# Altium PCB pcb.PcbDoc (part 1 of 2)
Units mm, origin at the board's own origin, x right, y up, seen from the top; angles counter-clockwise.
Board outline 100 x 100 mm, 2 copper layers (Top Layer, Bottom Layer); 16 components, 50 nets, 301 pads, 580 vias.
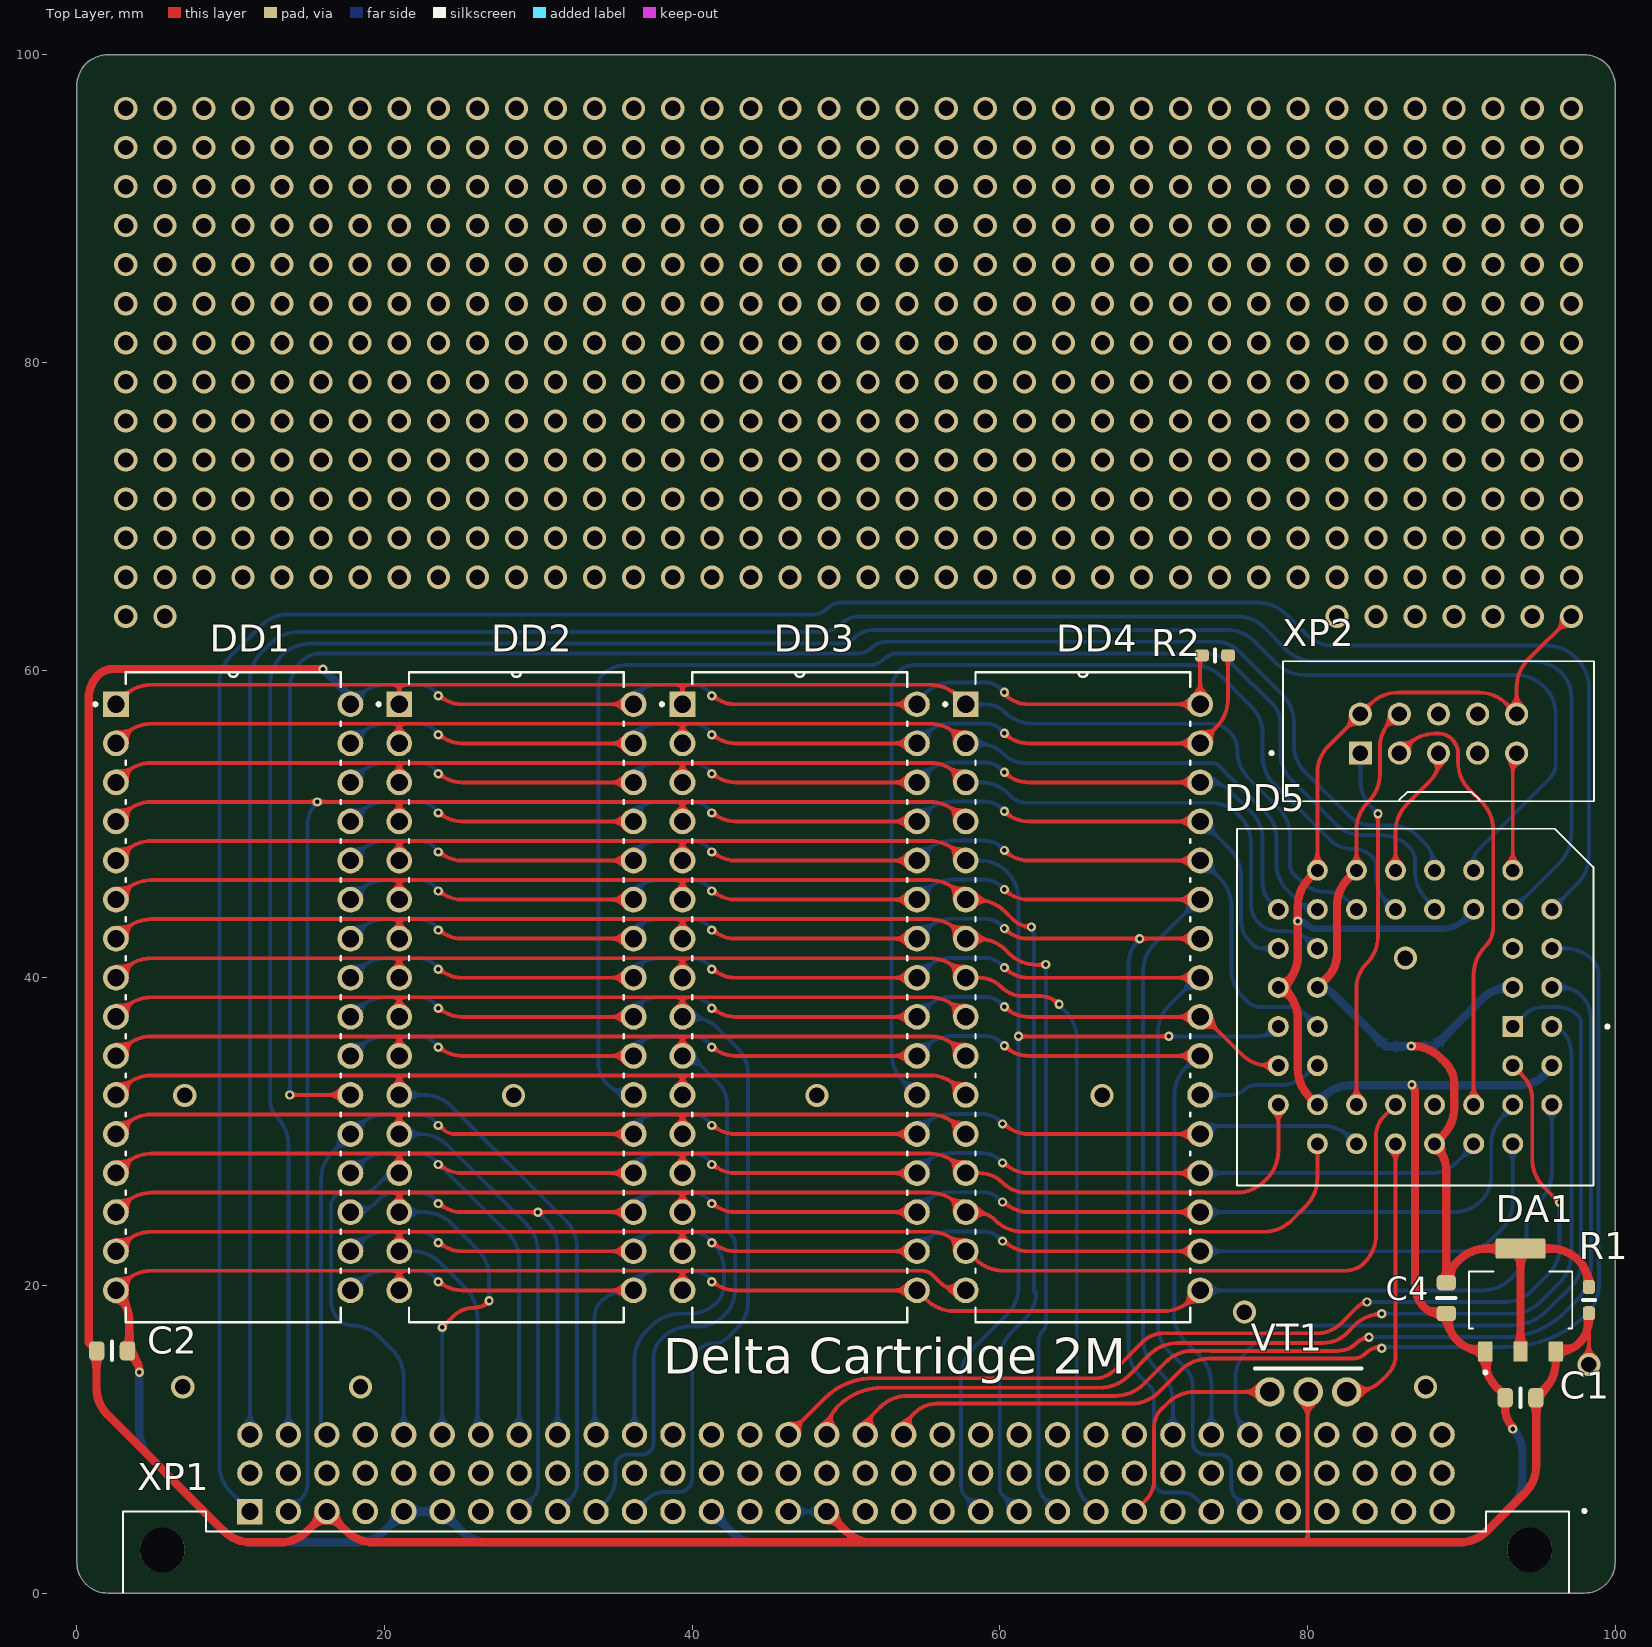
[diagram p0: Top Layer view]
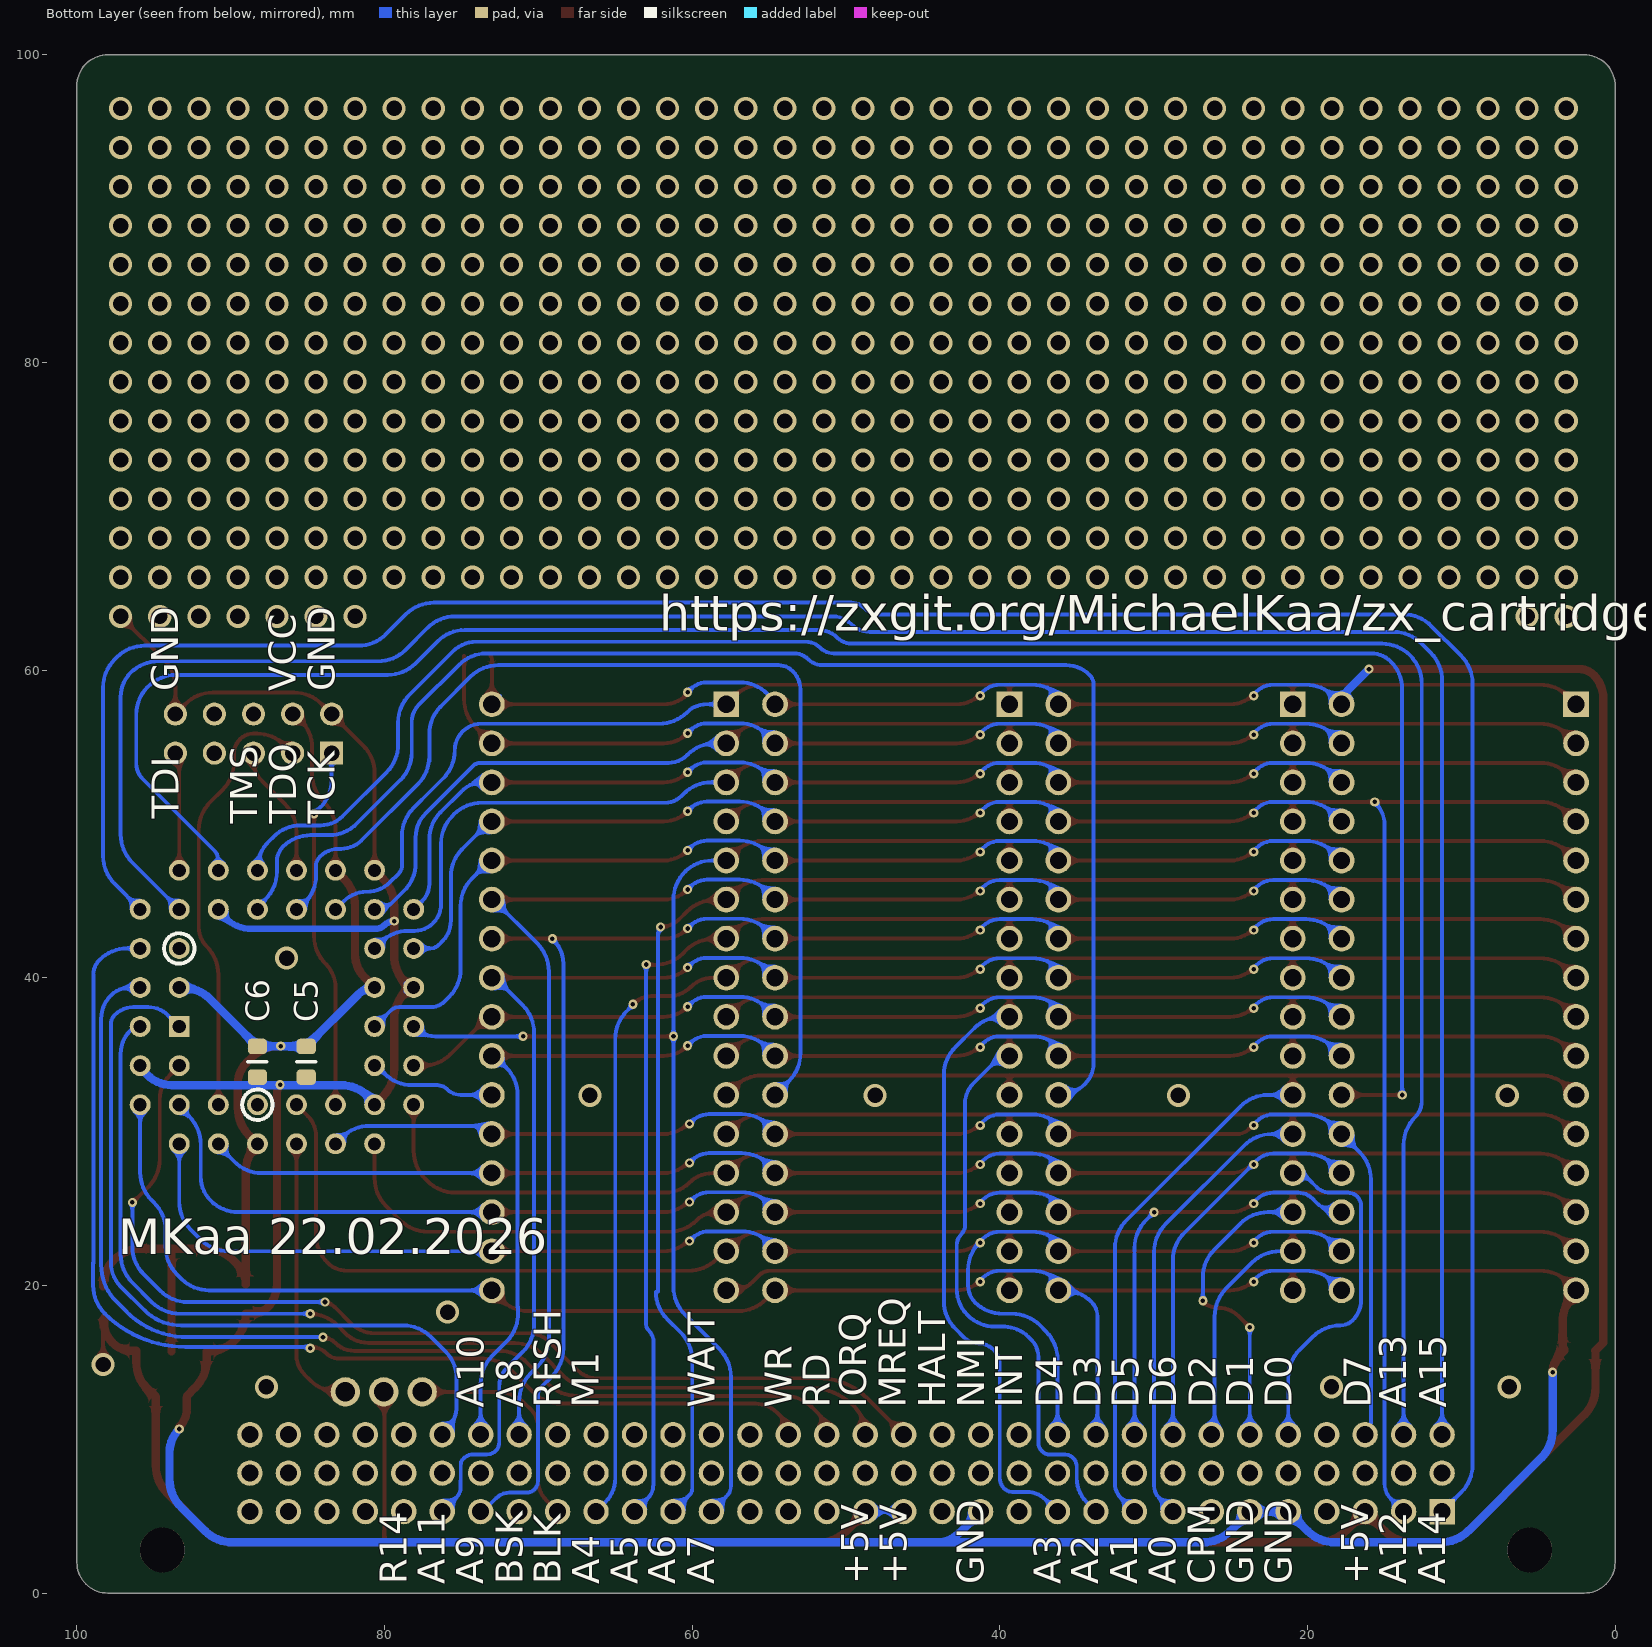
[diagram p1: Bottom Layer view, seen from below]
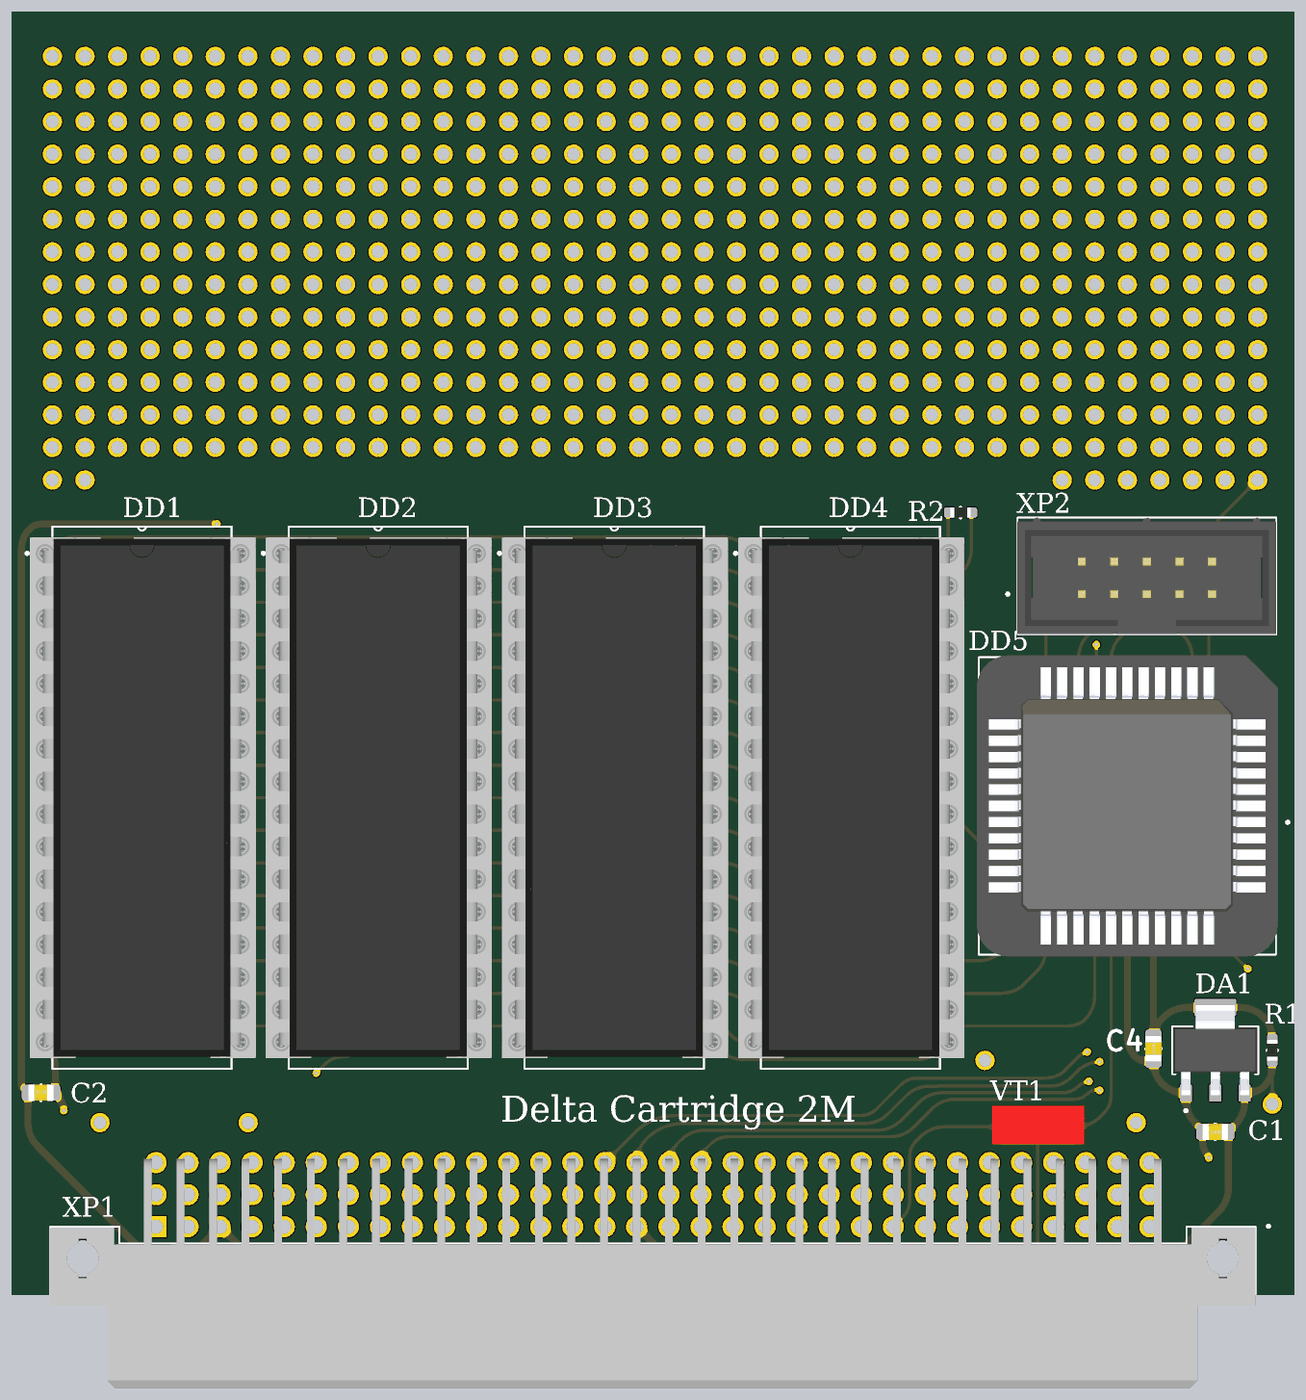
[diagram p3: 3D render of the assembled board from above, using the file's embedded part models]

## Layer stack, top to bottom
Top Solder: solder mask 0.0102, Solder Resist, Dk 3.5
Top Layer: signal copper 0.0356
Dielectric 1: dielectric 0.32, FR-4, Dk 4.8
Bottom Layer: signal copper 0.0356
Bottom Solder: solder mask 0.0102, Solder Resist, Dk 3.5

## Board outline
2,0 cw(c2,2) 0,2 0,98 cw(c2,98) 2,100 98,100 cw(c98,98) 100,98 100,2 cw(c98,2) 98,0

## Design rules (kind name [scope] priority, off if disabled: settings)
Clearance [All] p1: gap=0.254 ignorepadtopadclearanceinfootprint=FALSE except(0: Arc-Hole Track-Hole SMDPad-Hole THPad-Hole Via-Hole Fill-Hole Poly-Hole Region-Hole Text-Hole)
PolygonConnect [All] p1: connectstyle=Relief reliefconductorwidth=0.254 reliefentries=4 polygonreliefangle="90 Angle" airgapwidth=0.254
RoomDefinition main [InComponentClass('main')] p1: confinementstyle=ConfineIn formatcopy=TRUE lockcomponents=FALSE outline -0.44,-8.31 104.775,-8.31 104.775,100.33 -0.44,100.33
RoutingVias [All] p1: holewidth=0.711 width=1.27 viastyle="Through Hole" minholewidth=0.711 minwidth=1.27 maxholewidth=0.711 maxwidth=1.27
SolderMaskExpansion [All] p1: expansion=0.102
Width [All] p1: maxlimit=0.54 minlimit=0.254 preferedwidth=0.254 minimp=50.000000 maximp=50.000000 favimp=50.000000
30 further rules are at their usual default settings.

## Components (designator, comment, footprint, x,y, rotation, side; value= is the part's Value field where it differs from the comment)
C1 "10uF" C0805 93.853,12.7 r180 top
C2 "10uF" C0805 2.286,15.748 r0 top
C4 "10uF" C0805 89.027,19.177 r270 top
C5 "10uF" C0805 85.09,34.544 r270 bottom
C6 "10uF" C0805 88.265,34.544 r270 bottom
DA1 "AMS1117-3.3" SOT229P700X180-4N 93.853,19.05 r90 top
DD1 "AM29F040B" DIP254P1524X482-32 17.78,19.685 r0 top
DD2 "AM29F040B" DIP254P1524X482-32 36.195,19.685 r0 top
DD3 "AM29F040B" DIP254P1524X482-32 54.61,19.685 r0 top
DD4 "AM29F040B" DIP254P1524X482-32 73.025,19.685 r0 top
DD5 "EPM7064SLC44" PLCC-44-R 86.995,38.1 r270 top
R1 "0" R0603 98.298,19.05 r90 top
R2 "0" R0603 73.99,60.96 r180 top
VT1 "КТ315Б" KT-13 80.05,13.081 r0 top
XP1 "delta_device" DELTA-DEVICE 50,5.3 r0 top
XP2 "BH-10" BH-10 88.519,55.88 r0 top

## Footprints (in the part's own frame and the unit in brackets; to place one, negate y for a bottom-side part, rotate by r counter-clockwise, add the part's x,y. Pads: shape width x height; smd on the part's side, far side on the other; paste and mask are expansions set on the pad)
BH-10 [mm]
  rect 1.508x1.508 / inner round 1.508 / far side rect 1.508x1.508 hole 1: 1(-5.08,-1.27)
  round 1.508 hole 1: 2(-5.08,1.27) 3(-2.54,-1.27) 4(-2.54,1.27) 5(0,-1.27) 6(0,1.27) 7(2.54,-1.27) 8(2.54,1.27) 9(5.08,-1.27) 10(5.08,1.27)
  silkscreen extent -10.95,-4.4 10.1,4.7, body extent -10.1,-4.39 10.1,4.7, height 9.09
C0805 [mm] "Chip_Capasitor_0805"
  rrect50% 1x1.25 smd mask+0.102: 1(-1,0) 2(1,0)
  silkscreen extent 0,-0.6 0,0.6, body extent -1,-0.64 1,0.65, height 1.35
DELTA-DEVICE [mm]
  rect 1.65x1.65 / inner round 1.65 / far side rect 1.65x1.65 hole 1.1: A1(-38.75,0)
  round 1.65 hole 1.1: A2(-36.25,0) A3(-33.75,0) A4(-31.25,0) A5(-28.75,0) A6(-26.25,0) A7(-23.75,0) A8(-21.25,0) A9(-18.75,0) A10(-16.25,0) A11(-13.75,0) A12(-11.25,0) A13(-8.75,0) A14(-6.25,0) A15(-3.75,0) A16(-1.27,0) A17(1.25,0) A18(3.75,0) A19(6.25,0) A20(8.75,0) A21(11.25,0) A22(13.75,0) A23(16.25,0) A24(18.75,0) A25(21.25,0) A26(23.75,0) A27(26.25,0) A28(28.75,0) A29(31.25,0) A30(33.75,0) A31(36.25,0) A32(38.75,0) B1(-38.75,2.5) B2(-36.25,2.5) B3(-33.75,2.5) B4(-31.25,2.5) B5(-28.75,2.5) B6(-26.25,2.5) B7(-23.75,2.5) B8(-21.25,2.5) B9(-18.75,2.5) B10(-16.25,2.5) B11(-13.75,2.5) B12(-11.25,2.5) B13(-8.75,2.5) B14(-6.25,2.5) B15(-3.75,2.5) B16(-1.25,2.5) B17(1.25,2.5) B18(3.75,2.5) B19(6.25,2.5) B20(8.75,2.5) B21(11.25,2.5) B22(13.75,2.5) B23(16.25,2.5) B24(18.75,2.5) B25(21.25,2.5) B26(23.75,2.5) B27(26.25,2.5) B28(28.75,2.5) B29(31.25,2.5) B30(33.75,2.5) B31(36.25,2.5) B32(38.75,2.5) C1(-38.75,5) C2(-36.25,5) C3(-33.75,5) C4(-31.25,5) C5(-28.75,5) C6(-26.25,5) C7(-23.75,5) C8(-21.25,5) C9(-18.75,5) C10(-16.25,5) C11(-13.75,5) C12(-11.25,5) C13(-8.75,5) C14(-6.25,5) C15(-3.75,5) C16(-1.25,5) C17(1.25,5) C18(3.75,5) C19(6.25,5) C20(8.75,5) C21(11.25,5) C22(13.75,5) C23(16.25,5) C24(18.75,5) C25(21.25,5) C26(23.75,5) C27(26.25,5) C28(28.75,5) C29(31.25,5) C30(33.75,5) C31(36.25,5) C32(38.75,5)
  round 2.9 hole 2.9 unplated: ""(-44.45,-2.5) ""(44.45,-2.5)
  silkscreen extent -47,-5.26 48.1,0.14, body extent -47.01,-12.57 46.99,5.28, height 9.15
DIP254P1524X482-32 [mil]
  rect 66x66 hole 44: 1(-600,1500)
  round 66 hole 44: 2(-600,1400) 3(-600,1300) 4(-600,1200) 5(-600,1100) 6(-600,1000) 7(-600,900) 8(-600,800) 9(-600,700) 10(-600,600) 11(-600,500) 12(-600,400) 13(-600,300) 14(-600,200) 15(-600,100) 16(-600,0) 17(0,0) 18(0,100) 19(0,200) 20(0,300) 21(0,400) 22(0,500) 23(0,600) 24(0,700) 25(0,800) 26(0,900) 27(0,1000) 28(0,1100) 29(0,1200) 30(0,1300) 31(0,1400) 32(0,1500)
  silkscreen extent -657,-82 -25,1582, body extent -645,-49 49,1549, height 377
KT-13 [mm]
  round 1.905 hole 1.27: 1(-2.5,0) 2(0,0) 3(2.5,0)
  body extent -3.6,-1.35 3.6,1.65, height 5.72
PLCC-44-R [mm]
  rect 1.358x1.358 hole 0.85: 1(1.27,6.35)
  round 1.358 hole 0.85: 2(-1.27,8.89) 3(-1.27,6.35) 4(-3.81,8.89) 5(-3.81,6.35) 6(-6.35,8.89) 7(-8.89,6.35) 8(-6.35,6.35) 9(-8.89,3.81) 10(-6.35,3.81) 11(-8.89,1.27) 12(-6.35,1.27) 13(-8.89,-1.27) 14(-6.35,-1.27) 15(-8.89,-3.81) 16(-6.35,-3.81) 17(-8.89,-6.35) 18(-6.35,-8.89) 19(-6.35,-6.35) 20(-3.81,-8.89) 21(-3.81,-6.35) 22(-1.27,-8.89) 23(-1.27,-6.35) 24(1.27,-8.89) 25(1.27,-6.35) 26(3.81,-8.89) 27(3.81,-6.35) 28(6.35,-8.89) 29(8.89,-6.35) 30(6.35,-6.35) 31(8.89,-3.81) 32(6.35,-3.81) 33(8.89,-1.27) 34(6.35,-1.27) 35(8.89,1.27) 36(6.35,1.27) 37(8.89,3.81) 38(6.35,3.81) 39(8.89,6.35) 40(6.35,8.89) 41(6.35,6.35) 42(3.81,8.89) 43(3.81,6.35) 44(1.27,8.89)
  silkscreen extent -11.59,-11.59 11.59,12.6, body extent -11.74,-11.74 11.74,11.74, height 8.31
R0603 [mm] "Chip_Resistor_0603"
  rrect50% 0.9x0.8 smd mask+0.1: 1(-0.85,0) 2(0.85,0)
  silkscreen extent 0,-0.4 0,0.4, body extent -0.8,-0.4 0.8,0.4, height 0.45
SOT229P700X180-4N [mm]
  rrect15% 1.31x0.93 smd: 1(-3.345,2.29) 2(-3.345,0) 3(-3.345,-2.29)
  rrect15% 1.31x3.24 smd: 4(3.345,0)
  silkscreen extent -4.8,-3.36 1.86,3.36, body extent -3.5,-3.25 3.5,3.25, height 1.8

## Part data
C1 C2 C4 C5 C6: library part CapCer
DD5: "44-Pin PLCC44"
R1 R2: library part Res
VT1: "NPN Transistor"
XP2: "10 Position Total Dual Row 2.54 mm Pitch Straight Male Shrouded Box Header", Package=None, Check_prices=https://www.snapeda.com/parts/SBH11-PBPC-D05-ST-BK/Sullins+Connector+Solutions/view-part/?ref=eda, MF="Sullins Connector", MP=SBH11-PBPC-D05-ST-BK, SnapEDA_Link=https://www.snapeda.com/parts/SBH11-PBPC-D05-ST-BK/Sullins+Connector+Solutions/view-part/?ref=snap

## Via types
v1: diameter 1.5, hole 1, Top Layer to Bottom Layer, 513 vias
v2: diameter 0.6, hole 0.3, Top Layer to Bottom Layer, 67 vias

## Nets (pads, with @x,y where several pads share a name; then routed paths per layer and width w, separated by ;. In a path a pad name is that pad's centre, name@x,y a point inside that pad or via, vN(x,y) a via of type N, cw(c..) or ccw(c..) an arc to the next point about the centre after c; other vN are vias at no path point)
+5.0V: C1.1 C2.1 DA1.3 DD1.32 DD2.32 DD3.32 DD4.32 R1.1 R2.2 VT1.2 XP1.A3 XP1.A15 XP1.A16 | length 256.9
  Top Layer w0.254: v2@23.495,58.42 ccw(c25.028,59.953) 25.028,57.785 DD2.32@36.195,57.785 ; v2@41.275,58.42 ccw(c42.808,59.953) 42.808,57.785 DD3.32@53.975,57.785 ; v2@60.325,58.42 ccw(c61.858,59.953) 61.858,57.785 DD4.32@73.025,57.785 73.025,60.704 cw(c73.459,60.704) R2.2@73.152,61.011 ; 80.01,3.302 80.01,12.774 cw(c80.444,12.774) VT1.2@80.137,13.081 ; v1(98.298,14.859) 98.298,17.789 R1.1@98.298,18.034
  Top Layer w0.54: C2.1@1.27,15.621 1.27,13.371 ccw(c3.81,13.371) 2.014,11.575 9.543,4.046 ccw(c11.339,5.842) 11.339,3.302 13.2,3.302 ccw(c13.2,5.842) 14.996,4.046 XP1.A3@16.25,5.3 17.504,4.046 ccw(c19.3,5.842) 19.3,3.302 51.689,3.302 ; C2.1@1.286,15.748 1.281,15.753 1.281,15.764 0.762,16.282 0.762,58.157 cw(c2.93,58.157) 1.397,59.69 cw(c2.317,58.77) 2.317,60.071 v2@15.971,60.071 ; XP1.A16@48.73,5.3 50.049,3.981 ccw(c51.689,5.622) 51.689,3.302 ; 53.086,3.302 51.689,3.302 ; 53.177,3.302 80.01,3.302 89.88,3.302 ccw(c89.88,5.842) 91.676,4.046 94.125,6.495 ccw(c92.329,8.291) 94.869,8.291 C1.1@94.869,12.573 ; C1.1@94.869,12.7 94.869,12.774 94.998,12.904 ccw(c93.603,15.026) 96.143,15.026 DA1.3@96.143,15.705 ; DA1.3@96.139,15.748 96.437,15.748 ccw(c96.437,17.482) 97.663,16.256 ccw(c96.13,17.789) R1.1@98.298,17.789
  Bottom Layer w0.254: 17.421,58.652 cw(c16.554,57.785) DD1.32@17.78,57.785 18.306,58.311 cw(c20.102,56.515) 20.102,59.055 22.225,59.055 cw(c22.225,57.522) 23.309,58.606 v2@23.495,58.42 ; DD2.32@36.086,58.311 cw(c37.882,56.515) 37.882,59.055 40.005,59.055 cw(c40.005,57.522) 41.089,58.606 ; DD2.32@36.195,57.785 DD2.32@36.721,58.311 ; XP1.A15@46.25,5.3 48.553,5.3 ccw(c48.553,5.676) XP1.A16@48.819,5.41 ; 55.111,58.463 cw(c56.907,56.667) 56.907,59.207 59.03,59.207 cw(c59.03,57.674) v2@60.114,58.758 ; DD4.32@72.499,58.311 DD4.32@73.025,57.785
  Bottom Layer w0.54: v2(16.002,60.071) 17.421,58.652
  other v2: 23.495,58.344 41.275,58.344 60.3,58.572
+EPM: C4.1 C5.1 C6.1 DA1.2 DA1.4 DD5.3 DD5.15 DD5.23 DD5.35 R1.2 XP2.4 | length 71.2
  Top Layer w0.254: DD5.15@83.185,46.99 83.185,49.621 cw(c85.725,49.621) 83.929,51.417 83.965,51.453 ccw(c82.169,53.249) 84.709,53.249 84.709,54.955 cw(c87.249,54.955) 85.453,56.751 XP2.4@85.852,57.15
  Top Layer w0.54: DD5.23@80.645,39.37 81.286,40.011 ; 81.287,40.012 ccw(c79.769,41.529) 81.915,41.529 81.915,44.668 cw(c84.455,44.668) 82.659,46.464 DD5.15@83.185,46.99 ; v2(86.741,35.56) 86.832,35.56 cw(c86.832,33.02) 88.628,34.816 88.996,34.448 cw(c87.695,33.147) 89.535,33.147 89.535,31.532 cw(c86.995,31.532) 88.791,29.736 DD5.35@88.265,29.21 88.283,29.192 cw(c86.487,27.396) 89.027,27.396 C4.1@89.027,20.177 ; C4.1@89.027,20.066 cw(c90.867,20.066) 89.566,21.367 89.85,21.651 cw(c91.646,19.855) 91.646,22.395 DA1.4@93.853,22.395 ; DA1.2@93.853,15.705 DA1.4@93.853,22.395 ; R1.2@98.298,19.939 98.298,19.971 ccw(c95.922,19.971) 97.602,21.651 ccw(c95.806,19.855) 95.806,22.395 DA1.4@93.853,22.395
  Bottom Layer w0.54: DD5.23@80.645,39.37 cw(c80.645,37.876) 81.702,38.932 ; 81.702,38.932 C5.1@85.09,35.544 86.702,35.544 ccw(c86.702,35.599) v2(86.741,35.56) C6.1@88.265,35.544 91.347,38.626 cw(c93.143,36.83) 93.143,39.37 DD5.3@93.218,39.37
A0: DD1.12 DD2.12 DD3.12 DD4.12 XP1.A8 | length 87.3
  Top Layer w0.254: DD1.12@3.066,30.371 cw(c4.862,28.575) 4.862,31.115 20.955,31.115 ; DD2.12@20.955,29.845 20.955,31.115 ; DD3.12@39.37,29.845 39.37,31.115 ; DD4.12@57.259,30.371 ccw(c55.463,28.575) 55.463,31.115 39.37,31.115 ; 20.955,31.115 39.37,31.115
  Bottom Layer w0.254: DD2.12@20.701,29.845 DD2.12@20.955,29.845 22.316,29.845 cw(c22.316,27.305) 24.112,29.101 29.228,23.985 cw(c27.432,22.189) 29.972,22.189 29.972,6.985 cw(c28.854,6.985) 29.645,6.195 XP1.A8@28.75,5.3
A1: DD1.11 DD2.11 DD3.11 DD4.11 XP1.A9 | length 90.8
  Top Layer w0.254: DD1.11@3.066,32.911 cw(c4.862,31.115) 4.862,33.655 20.955,33.655 ; DD2.11@20.955,32.385 20.955,33.655 ; DD3.11@39.37,32.385 39.37,33.655 ; DD4.11@57.259,32.911 ccw(c55.463,31.115) 55.463,33.655 39.37,33.655 ; 20.955,33.655 39.37,33.655
  Bottom Layer w0.254: DD2.11@20.955,32.385 22.57,32.385 cw(c22.57,29.845) 24.366,31.641 31.768,24.239 cw(c29.972,22.443) 32.512,22.443 32.512,7.112 cw(c31.184,7.112) 32.123,6.173 XP1.A9@31.25,5.3
A2: DD1.10 DD2.10 DD3.10 DD4.10 XP1.A10 | length 93.9
  Top Layer w0.254: DD1.10@3.066,35.451 cw(c4.862,33.655) 4.862,36.195 20.955,36.195 ; DD2.10@20.955,34.925 20.955,36.195 ; DD3.10@39.37,34.925 39.37,36.195 ; DD4.10@57.259,35.451 ccw(c55.463,33.655) 55.463,36.195 39.37,36.195 ; 20.955,36.195 39.37,36.195
  Bottom Layer w0.254: XP1.A10@33.75,5.3 34.335,5.885 ccw(c32.727,7.493) 35.001,7.493 35.001,8.237 cw(c35.782,8.237) 35.23,8.788 cw(c35.755,8.263) 35.755,9.006 36.745,9.006 ccw(c36.745,9.737) 37.262,9.22 ccw(c36.71,9.772) 37.49,9.772 37.49,15.355 cw(c39.051,15.355) 37.948,16.459 38.147,16.658 cw(c39.751,15.054) 39.29,17.276 cw(c39.751,15.054) 39.65,17.321 cw(c39.751,15.054) 39.751,17.323 ; DD3.10@39.395,35.027 cw(c39.395,33.984) 40.133,34.721 41.707,33.147 cw(c40.358,31.798) 42.266,31.798 42.266,23.894 ccw(c43.046,23.894) 42.494,23.343 cw(c41.758,22.607) 42.799,22.607 42.799,19.766 cw(c40.396,19.766) 42.095,18.067 cw(c40.299,19.863) 40.299,17.323 39.751,17.323 ; 39.726,17.323 39.751,17.323
A3: DD1.9 DD2.9 DD3.9 DD4.9 XP1.A11 | length 96.2
  Top Layer w0.254: DD1.9@3.066,37.991 cw(c4.862,36.195) 4.862,38.735 20.955,38.735 ; DD2.9@20.955,37.465 20.955,38.735 ; DD3.9@39.37,37.465 39.37,38.735 ; DD4.9@57.259,37.991 ccw(c55.463,36.195) 55.463,38.735 39.37,38.735 ; 20.955,38.735 39.37,38.735
  Bottom Layer w0.254: XP1.A11@36.25,5.3 37.005,6.055 cw(c38.269,4.791) 38.269,6.579 39.174,6.579 ccw(c39.174,7.359) 39.726,6.807 ccw(c39.051,7.482) 40.005,7.482 40.005,14.843 cw(c41.393,14.843) 40.411,15.824 cw(c41.393,14.843) 41.393,16.231 ccw(c41.393,17.541) 42.319,16.614 42.893,17.188 ccw(c41.097,18.985) 43.637,18.985 43.637,33.695 ccw(c41.097,33.695) 42.893,35.491 41.663,36.721 ccw(c39.867,34.925) 39.867,37.465 DD3.9@39.37,37.465 DD3.9@39.345,37.465
A4: DD1.8 DD2.8 DD3.8 DD4.8 XP1.A23 | length 97.6
  Top Layer w0.254: DD1.8@3.066,40.531 cw(c4.862,38.735) 4.862,41.275 20.955,41.275 ; DD2.8@20.955,40.005 20.955,41.275 ; DD3.8@39.37,40.005 39.37,41.275 ; DD4.8@57.259,40.531 ccw(c55.463,38.735) 55.463,41.275 39.37,41.275 ; DD4.8@57.683,40.005 DD4.8@57.785,40.005 58.661,40.005 cw(c58.661,38.01) 60.071,39.421 ccw(c61.543,40.893) 61.543,38.811 62.65,38.811 cw(c62.65,37.25) 63.754,38.354 63.83,38.278 v2(63.856,38.278) ; 20.955,41.275 39.37,41.275
  Bottom Layer w0.254: v2@63.79,38.293 64.255,37.828 cw(c62.459,36.032) 64.999,36.032 64.999,7.493 ccw(c67.272,7.493) 65.664,5.886 XP1.A23@66.25,5.3
A5: DD1.7 DD2.7 DD3.7 DD4.7 XP1.A22 | length 99
  Top Layer w0.254: DD1.7@3.066,43.071 cw(c4.862,41.275) 4.862,43.815 20.955,43.815 ; DD2.7@20.955,42.545 20.955,43.815 ; DD3.7@39.37,42.545 39.37,43.815 ; DD4.7@57.259,43.071 ccw(c55.463,41.275) 55.463,43.815 39.37,43.815 ; DD4.7@57.785,42.545 58.587,42.545 cw(c58.587,40.005) 60.383,41.801 60.597,41.587 ccw(c62.393,43.383) 62.393,40.843 v2@63.068,40.843 ; 20.955,43.815 39.37,43.815
  Bottom Layer w0.254: v2@62.992,40.843 62.992,17.462 cw(c62.472,17.462) 62.84,17.094 ccw(c63.637,16.297) 62.509,16.297 62.509,7.047 cw(c62.282,6.934) 62.536,6.943 ccw(c63.669,6.985) 62.867,6.183 XP1.A22@63.75,5.3
  other v2: 62.992,40.869
A6: DD1.6 DD2.6 DD3.6 DD4.6 XP1.A21 | length 101.2
  Top Layer w0.254: DD1.6@3.066,45.611 cw(c4.862,43.815) 4.862,46.355 20.955,46.355 ; DD2.6@20.955,45.085 20.955,46.355 ; DD3.6@39.37,45.085 39.37,46.355 ; DD4.6@57.259,45.611 ccw(c55.463,43.815) 55.463,46.355 39.37,46.355 ; DD4.6@57.861,45.06 58.536,45.06 cw(c58.536,42.52) 60.332,44.316 60.839,43.809 ccw(c62.052,45.024) v2(62.052,43.307) ; 20.955,46.355 39.37,46.355
  Bottom Layer w0.254: XP1.A21@61.25,5.3 60.173,6.377 cw(c60.603,6.807) 59.995,6.807 59.995,15.128 cw(c62.535,15.128) 60.739,16.924 61.613,17.798 ccw(c59.817,19.594) 62.357,19.594 ; v2@61.976,43.307 61.983,43.3 cw(c61.388,42.704) 62.23,42.704 62.23,19.594
A7: DD1.5 DD2.5 DD3.5 DD4.5 DD5.24 XP1.A20 | length 120.9
  Top Layer w0.254: DD1.5@3.066,48.151 cw(c4.862,46.355) 4.862,48.895 20.955,48.895 ; DD2.5@20.955,47.625 20.955,48.895 ; DD3.5@39.37,47.625 39.37,48.895 ; DD4.5@57.259,48.151 ccw(c55.463,46.355) 55.463,48.895 39.37,48.895 ; v2(61.214,36.195) v2@71.067,36.195 ; 20.955,48.895 39.37,48.895
  Bottom Layer w0.254: DD4.5@57.81,47.625 58.709,47.625 cw(c58.709,45.135) 60.47,46.896 cw(c58.674,45.1) 61.214,45.1 v2(61.214,36.195) 61.214,19.899 cw(c58.674,19.899) 60.47,18.103 58.224,15.857 ccw(c60.02,14.061) 57.48,14.061 57.48,6.96 ccw(c58.421,6.96) 57.756,6.294 XP1.A20@58.75,5.3 ; v2(70.993,36.195) 76.699,36.195 ccw(c76.699,38.363) DD5.24@78.232,36.83
A8: DD1.27 DD2.27 DD3.27 DD4.27 XP1.C25 | length 91.4
  Top Layer w0.254: v2@23.495,45.72 ccw(c25.028,47.253) 25.028,45.085 DD2.27@36.195,45.085 ; v2@41.275,45.72 ccw(c42.808,47.253) 42.808,45.085 DD3.27@53.975,45.085 ; v2@60.325,45.72 ccw(c61.858,47.253) 61.858,45.085 DD4.27@73.025,45.085
  Bottom Layer w0.254: DD1.27@18.306,45.611 cw(c20.102,43.815) 20.102,46.355 22.225,46.355 cw(c22.225,44.822) 23.309,45.906 ; DD2.27@36.086,45.611 cw(c37.882,43.815) 37.882,46.355 40.005,46.355 cw(c40.005,44.822) 41.089,45.906 ; DD3.27@55.111,45.636 cw(c56.907,43.84) 56.907,46.38 59.03,46.38 cw(c59.03,44.847) v2@60.114,45.931 ; XP1.C25@71.25,10.3 71.25,12.483 ccw(c68.71,12.483) 70.506,14.279 70.061,14.725 cw(c71.857,16.521) 69.317,16.521 69.317,40.426 cw(c71.857,40.426) 70.061,42.222 DD4.27@72.949,45.11
  other v2: 23.495,45.644 41.275,45.644 60.3,45.745
A9: DD1.26 DD2.26 DD3.26 DD4.26 XP1.A26 | length 95.2
  Top Layer w0.254: v2@23.495,43.18 ccw(c25.028,44.713) 25.028,42.545 DD2.26@36.195,42.545 ; v2@41.275,43.18 ccw(c42.808,44.713) 42.808,42.545 DD3.26@53.975,42.545 ; v2@60.325,43.18 ccw(c61.858,44.713) 61.858,42.545 v2(69.088,42.545) DD4.26@73.025,42.545
  Bottom Layer w0.254: DD1.26@18.306,43.071 cw(c20.102,41.275) 20.102,43.815 22.225,43.815 cw(c22.225,42.282) 23.309,43.366 ; DD2.26@36.086,43.071 cw(c37.882,41.275) 37.882,43.815 40.005,43.815 cw(c40.005,42.282) 41.089,43.366 ; DD3.26@55.111,43.096 cw(c56.907,41.3) 56.907,43.84 59.03,43.84 cw(c59.03,42.307) v2@60.114,43.391 ; v2@69.113,42.545 68.991,42.423 ccw(c70.475,40.939) 68.377,40.939 68.377,15.886 ccw(c70.917,15.886) 69.121,14.09 69.825,13.386 ; 69.825,13.386 cw(c69.334,12.895) 70.028,12.895 70.028,10.414 ; 70.028,10.403 70.028,7.283 ccw(c70.808,7.283) 70.256,6.731 ccw(c70.747,7.222) 70.747,6.528 71.857,6.528 ; 71.882,6.528 cw(c71.882,5.301) 72.749,6.169 73.524,5.393 ccw(c73.75,5.619) XP1.A26@73.75,5.3
  other v2: 23.495,43.104 41.275,43.104 60.3,43.205
A10: DD1.23 DD2.23 DD3.23 DD4.23 XP1.C26 | length 80.6
  Top Layer w0.254: v2@23.495,35.56 ccw(c25.028,37.093) 25.028,34.925 DD2.23@36.195,34.925 ; v2@41.275,35.56 ccw(c42.808,37.093) 42.808,34.925 DD3.23@53.975,34.925 ; v2@60.325,35.56 ccw(c61.858,37.093) 61.858,34.925 DD4.23@73.025,34.925
  Bottom Layer w0.254: DD1.23@18.306,35.451 cw(c20.102,33.655) 20.102,36.195 22.225,36.195 cw(c22.225,34.662) 23.309,35.746 ; DD2.23@36.086,35.451 cw(c37.882,33.655) 37.882,36.195 40.005,36.195 cw(c40.005,34.662) 41.089,35.746 ; DD3.23@55.111,35.476 cw(c56.907,33.68) 56.907,36.22 59.03,36.22 cw(c59.03,34.687) v2@60.114,35.771 ; 71.323,18.593 71.323,18.146 ccw(c73.863,18.146) 71.349,17.788 ccw(c73.863,18.146) 72.067,16.35 73.006,15.411 cw(c71.21,13.615) 73.75,13.615 XP1.C26@73.75,10.3 ; 71.349,18.593 71.349,32.374 cw(c73.889,32.374) 72.093,34.17 DD4.23@72.898,34.976
  other v2: 23.495,35.484 41.275,35.484 60.3,35.585
A11: DD1.25 DD2.25 DD3.25 DD4.25 XP1.A27 | length 93.3
  Top Layer w0.254: v2@23.495,40.64 ccw(c25.028,42.173) 25.028,40.005 DD2.25@36.195,40.005 ; v2@41.275,40.64 ccw(c42.808,42.173) 42.808,40.005 DD3.25@53.975,40.005 ; v2@60.325,40.64 ccw(c61.858,42.173) 61.858,40.005 DD4.25@73.025,40.005
  Bottom Layer w0.254: DD1.25@18.306,40.531 cw(c20.102,38.735) 20.102,41.275 22.225,41.275 cw(c22.225,39.742) 23.309,40.826 ; DD2.25@36.086,40.531 cw(c37.882,38.735) 37.882,41.275 40.005,41.275 cw(c40.005,39.742) 41.089,40.826 ; DD3.25@55.111,40.556 cw(c56.907,38.76) 56.907,41.3 59.03,41.3 cw(c59.03,39.767) v2@60.114,40.851 ; 72.796,9.22 72.776,9.241 cw(c73.336,9.8) 72.761,9.256 ; DD4.25@72.822,40.03 71.026,38.234 ccw(c72.822,36.438) 70.282,36.438 70.282,17.461 ccw(c72.822,17.461) 71.026,15.664 72.034,14.656 cw(c70.804,13.426) 72.544,13.426 72.544,9.8 ccw(c73.336,9.8) 72.761,9.256 ; XP1.A27@76.25,5.3 75.333,6.217 cw(c76,6.883) 75.057,6.883 75.057,7.287 75.044,7.3 75.044,8.34 ccw(c74.481,8.34) 74.879,8.738 ccw(c74.205,8.063) 74.205,9.017 73.359,9.017 cw(c73.359,9.884) 72.761,9.256
  other v2: 23.495,40.564 41.275,40.564 60.3,40.665
A12: DD1.4 DD2.4 DD3.4 DD4.4 XP1.A2 | length 103.9
  Top Layer w0.254: DD1.4@3.066,50.691 cw(c4.862,48.895) 4.862,51.435 v2(15.621,51.435) 20.955,51.435 ; DD2.4@20.955,50.165 20.955,51.435 ; DD3.4@39.37,50.165 39.37,51.435 ; DD4.4@57.259,50.691 ccw(c55.463,48.895) 55.463,51.435 39.37,51.435 ; 20.955,51.435 39.37,51.435
  Bottom Layer w0.254: XP1.A2@13.75,5.3 14.579,6.129 ccw(c13.595,7.112) 14.986,7.112 14.986,49.902 cw(c17.154,49.902) v2(15.621,51.435)
A13: DD5.9 XP1.C2 | length 149.1
  Bottom Layer w0.254: XP1.C2@13.75,10.3 13.75,29.14 ccw(c11.21,29.14) 13.006,30.936 cw(c14.052,31.981) 12.573,31.981 12.573,59.146 cw(c15.113,59.146) 13.317,60.942 13.353,60.978 cw(c15.149,59.182) 15.149,61.722 49.626,61.722 ccw(c49.626,63.023) 50.546,62.103 cw(c51.772,60.877) 51.772,62.611 74.767,62.611 cw(c74.767,60.071) 76.563,61.867 77.996,60.434 ccw(c79.792,62.23) 79.792,59.69 93.563,59.69 cw(c93.563,57.15) 95.359,58.946 95.395,58.91 cw(c93.599,57.114) 96.139,57.114 96.139,53.95 cw(c94.667,53.95) 95.708,52.909 91.059,48.26 ccw(c91.672,47.647) 90.805,47.647 DD5.9@90.805,46.99
A14: DD5.6 XP1.A1 | length 163.8
  Bottom Layer w0.254: XP1.A1@11.25,5.3 10.015,6.535 cw(c11.811,8.331) 9.271,8.331 9.271,59.146 cw(c11.811,59.146) 10.015,60.942 11.956,62.883 cw(c13.752,61.087) 13.752,63.627 47.848,63.627 ccw(c47.848,64.928) 48.768,64.008 cw(c49.688,63.088) 49.688,64.389 76.799,64.389 cw(c76.799,61.849) 78.595,63.645 79.901,62.339 ccw(c81.697,64.135) 81.697,61.595 95.595,61.595 cw(c95.595,59.055) 97.391,60.851 97.554,60.688 cw(c95.758,58.892) 98.298,58.892 98.298,47.915 cw(c95.758,47.915) 97.554,46.119 DD5.6@95.885,44.45
A15: DD5.8 XP1.C1 | length 154.5
  Bottom Layer w0.254: XP1.C1@11.25,10.3 11.25,59.347 cw(c13.79,59.347) 11.994,61.143 12.591,61.74 cw(c14.387,59.944) 14.387,62.484 48.431,62.484 ccw(c48.431,64.218) 49.657,62.992 cw(c50.883,61.766) 50.883,63.5 75.402,63.5 cw(c75.402,60.96) 77.198,62.756 78.631,61.323 ccw(c80.427,63.119) 80.427,60.579 94.706,60.579 cw(c94.706,58.039) 96.502,59.835 cw(c94.925,58.258) 97.155,58.258 97.155,49.312 cw(c94.615,49.312) 96.411,47.516 DD5.8@93.345,44.45
AD13: DD1.28 DD2.28 DD3.28 DD4.28 DD5.25 | length 69.9
  Top Layer w0.254: v2@23.495,48.26 ccw(c25.028,49.793) 25.028,47.625 DD2.28@36.195,47.625 ; v2@41.275,48.26 ccw(c42.808,49.793) 42.808,47.625 DD3.28@53.975,47.625 ; v2@60.325,48.26 ccw(c61.858,49.793) 61.858,47.625 DD4.28@73.025,47.625
  Bottom Layer w0.254: DD1.28@18.306,48.151 cw(c20.102,46.355) 20.102,48.895 22.225,48.895 cw(c22.225,47.362) 23.309,48.446 ; DD2.28@36.086,48.151 cw(c37.882,46.355) 37.882,48.895 40.005,48.895 cw(c40.005,47.362) 41.089,48.446 ; DD3.28@55.111,48.176 cw(c56.907,46.38) 56.907,48.92 59.03,48.92 cw(c59.03,47.387) v2@60.114,48.471 ; DD4.28@73.152,47.625 74.313,46.464 cw(c72.517,44.668) 75.057,44.668 75.057,40.549 ccw(c77.597,40.549) 75.801,38.753 76.073,38.481 ; 76.073,38.481 ccw(c76.993,39.401) 76.993,38.1 79.016,38.1 cw(c79.016,37.233) 79.629,37.846 DD5.25@80.645,36.83
  other v2: 23.495,48.184 41.275,48.184 60.3,48.285
AD14: DD1.29 DD2.29 DD3.29 DD4.29 DD5.20 | length 65.5
  Top Layer w0.254: v2@23.495,50.8 ccw(c25.028,52.333) 25.028,50.165 DD2.29@36.195,50.165 ; v2@41.275,50.8 ccw(c42.808,52.333) 42.808,50.165 DD3.29@53.975,50.165 ; v2@60.325,50.8 ccw(c61.858,52.333) 61.858,50.165 DD4.29@73.025,50.165
  Bottom Layer w0.254: DD1.29@18.306,50.691 cw(c20.102,48.895) 20.102,51.435 22.225,51.435 cw(c22.225,49.902) 23.309,50.986 ; DD2.29@36.086,50.691 cw(c37.882,48.895) 37.882,51.435 40.005,51.435 cw(c40.005,49.902) 41.089,50.986 ; DD3.29@55.111,50.716 cw(c56.907,48.92) 56.907,51.46 59.03,51.46 cw(c59.03,49.927) v2@60.114,51.011 ; DD4.29@73.152,50.165 74.948,48.369 cw(c73.152,46.573) 75.692,46.573 75.692,43.688 ccw(c77.532,43.688) 76.231,42.387 76.469,42.149 ccw(c77.045,42.725) 77.045,41.91 DD5.20@78.105,41.91
  other v2: 23.495,50.724 41.275,50.724 60.3,50.825
AD15: DD1.3 DD2.3 DD3.3 DD4.3 DD5.21 | length 87.2
  Top Layer w0.254: DD1.3@3.066,53.231 cw(c4.862,51.435) 4.862,53.975 20.955,53.975 ; DD2.3@20.955,52.705 20.955,53.975 ; DD3.3@39.37,52.705 39.37,53.975 ; DD4.3@57.259,53.231 ccw(c55.463,51.435) 55.463,53.975 39.37,53.975 ; 20.955,53.975 39.37,53.975
  Bottom Layer w0.254: DD4.3@57.785,52.705 58.765,52.705 cw(c58.765,50.165) 60.561,51.961 60.706,51.816 ccw(c61.748,52.858) 61.748,51.384 73.675,51.384 cw(c73.675,48.844) 75.471,50.64 75.583,50.528 cw(c73.787,48.732) 76.327,48.732 76.327,44.787 ccw(c78.061,44.787) 76.835,43.561 ccw(c78.061,44.787) 78.061,43.053 78.45,43.053 cw(c78.45,40.513) 80.246,42.309 DD5.21@80.645,41.91
AD16: DD1.2 DD2.2 DD3.2 DD4.2 DD5.19 | length 86.1
  Top Layer w0.254: DD1.2@3.066,55.771 cw(c4.862,53.975) 4.862,56.515 20.955,56.515 ; DD2.2@20.955,55.245 20.955,56.515 ; DD3.2@39.37,55.245 39.37,56.515 ; DD4.2@57.259,55.771 ccw(c55.463,53.975) 55.463,56.515 39.37,56.515 ; 20.955,56.515 39.37,56.515
  Bottom Layer w0.254: DD4.2@57.785,55.245 58.511,55.245 cw(c58.511,52.705) 60.307,54.501 60.325,54.483 ccw(c61.551,55.709) 61.551,53.975 73.787,53.975 cw(c73.787,53.362) 74.22,53.796 77.343,50.673 ; 77.345,50.671 ccw(c76.423,49.753) 77.343,50.673 ; DD5.19@80.645,44.45 cw(c80.645,46.167) 79.431,44.953 78.722,45.662 cw(c80.518,47.458) 77.978,47.458 77.978,49.14 ccw(c75.81,49.14) 77.343,50.673
AD17: DD1.30 DD2.30 DD3.30 DD4.30 DD5.18 | length 65.5
  Top Layer w0.254: v2@23.495,53.34 ccw(c25.028,54.873) 25.028,52.705 DD2.30@36.195,52.705 ; v2@41.275,53.34 ccw(c42.808,54.873) 42.808,52.705 DD3.30@53.975,52.705 ; v2@60.325,53.34 ccw(c61.858,54.873) 61.858,52.705 DD4.30@73.025,52.705
  Bottom Layer w0.254: DD1.30@18.306,53.231 cw(c20.102,51.435) 20.102,53.975 22.225,53.975 cw(c22.225,52.442) 23.309,53.526 ; DD2.30@36.086,53.231 cw(c37.882,51.435) 37.882,53.975 40.005,53.975 cw(c40.005,52.442) 41.089,53.526 ; DD3.30@55.111,53.256 cw(c56.907,51.46) 56.907,54 59.03,54 cw(c59.03,52.467) v2@60.114,53.551 ; DD4.30@73.025,52.832 73.243,52.832 cw(c73.243,50.292) 75.039,52.088 76.345,50.782 cw(c74.549,48.986) 77.089,48.986 77.089,46.101 ccw(c78.622,46.101) 77.538,45.017 DD5.18@78.105,44.45
  other v2: 23.495,53.264 41.275,53.264 60.3,53.365
AD18: DD1.1 DD2.1 DD3.1 DD4.1 DD5.16 | length 91.8
  Top Layer w0.254: DD1.1@2.54,57.785 3.066,58.311 cw(c4.862,56.515) 4.862,59.055 20.955,59.055 ; DD2.1@20.955,57.785 20.955,59.055 ; DD3.1@39.37,57.785 39.37,59.055 ; DD4.1@57.785,57.785 57.259,58.311 ccw(c55.463,56.515) 55.463,59.055 39.37,59.055 ; 20.955,59.055 39.37,59.055
  Bottom Layer w0.254: DD4.1@57.785,57.785 59.073,57.785 cw(c59.073,55.989) 60.343,57.259 ccw(c62.139,59.055) 62.139,56.515 73.711,56.515 cw(c73.711,54.799) 74.925,56.012 cw(c73.685,54.773) 75.438,54.773 ccw(c77.978,54.773) 76.182,52.977 77.615,51.544 ; 77.597,51.562 78.123,51.036 cw(c76.327,49.24) 78.867,49.24 78.867,47.324 ccw(c79.673,47.324) 79.103,46.754 79.635,46.222 ccw(c81.153,47.739) 81.153,45.593 cw(c81.153,43.447) 82.671,44.964 DD5.16@83.185,44.45
BL_R: DD5.33 VT1.3 | length 18.2
  Top Layer w0.254: VT1.3@82.55,13.081 83.022,13.081 ccw(c83.022,15.621) 84.818,13.825 85.217,14.224 ccw(c83.991,15.45) 85.725,15.45 DD5.33@85.725,29.21
BLK_ROM: VT1.1 XP1.A24 | length 14.7
  Top Layer w0.254: XP1.A24@68.75,5.3 69.384,5.934 ; 69.367,5.918 69.471,6.022 ccw(c68.127,7.366) 70.028,7.366 70.028,10.834 cw(c71.589,10.834) 70.485,11.938 70.884,12.337 cw(c72.68,10.541) 72.68,13.081 VT1.1@77.55,13.081 VT1.1@77.597,13.081
CS0: DD1.22 DD5.11 | length 114.8
  Top Layer w0.254: v2(13.843,32.385) DD1.22@17.78,32.385
  Bottom Layer w0.254: v2(13.843,32.385) 13.843,58.765 cw(c16.383,58.765) 14.587,60.561 cw(c15.857,59.291) 15.857,61.087 50.769,61.087 ccw(c50.769,62.388) 51.689,61.468 cw(c52.609,60.548) 52.609,61.849 74.032,61.849 cw(c74.032,59.681) 75.565,61.214 78.377,58.402 cw(c76.581,56.606) 79.121,56.606 79.121,55.154 ccw(c81.661,55.154) 79.865,53.358 82.719,50.504 ccw(c84.15,51.935) 84.15,49.911 85.435,49.911 cw(c85.435,47.371) 87.231,49.167 87.521,48.877 cw(c85.725,47.081) 88.265,47.081 DD5.11@88.265,46.99 DD5.11@88.265,46.863
CS1: DD2.22 DD5.12 | length 92.9
  Bottom Layer w0.254: DD2.22@36.195,32.385 cw(c36.195,34.838) 34.461,33.103 cw(c35.792,34.435) 33.909,34.435 33.909,59.077 cw(c34.776,59.077) 34.163,59.69 cw(c35.696,58.157) 35.696,60.325 51.531,60.325 ccw(c51.531,61.626) 52.451,60.706 cw(c53.371,59.786) 53.371,61.087 73.37,61.087 cw(c73.37,58.547) 75.166,60.343 77.783,57.726 cw(c76.699,56.642) 78.232,56.642 78.232,54.646 ccw(c80.772,54.646) 78.976,52.85 81.806,50.02 ccw(c83.602,51.816) 83.602,49.276 84.8,49.276 cw(c84.8,46.736) 86.596,48.532 cw(c85.633,47.569) 86.995,47.569 86.995,46.899 ccw(c89.535,46.899) 87.739,45.103 DD5.12@88.265,44.577